# Altium PCB MCP3202.PcbDoc
Units mm, origin at the board's own origin, x right, y up, seen from the top; angles counter-clockwise.
Board outline 22.22 x 25.4 mm, 2 copper layers (Top Layer, Bottom Layer); 3 components, 8 nets, 18 pads, 8 vias.
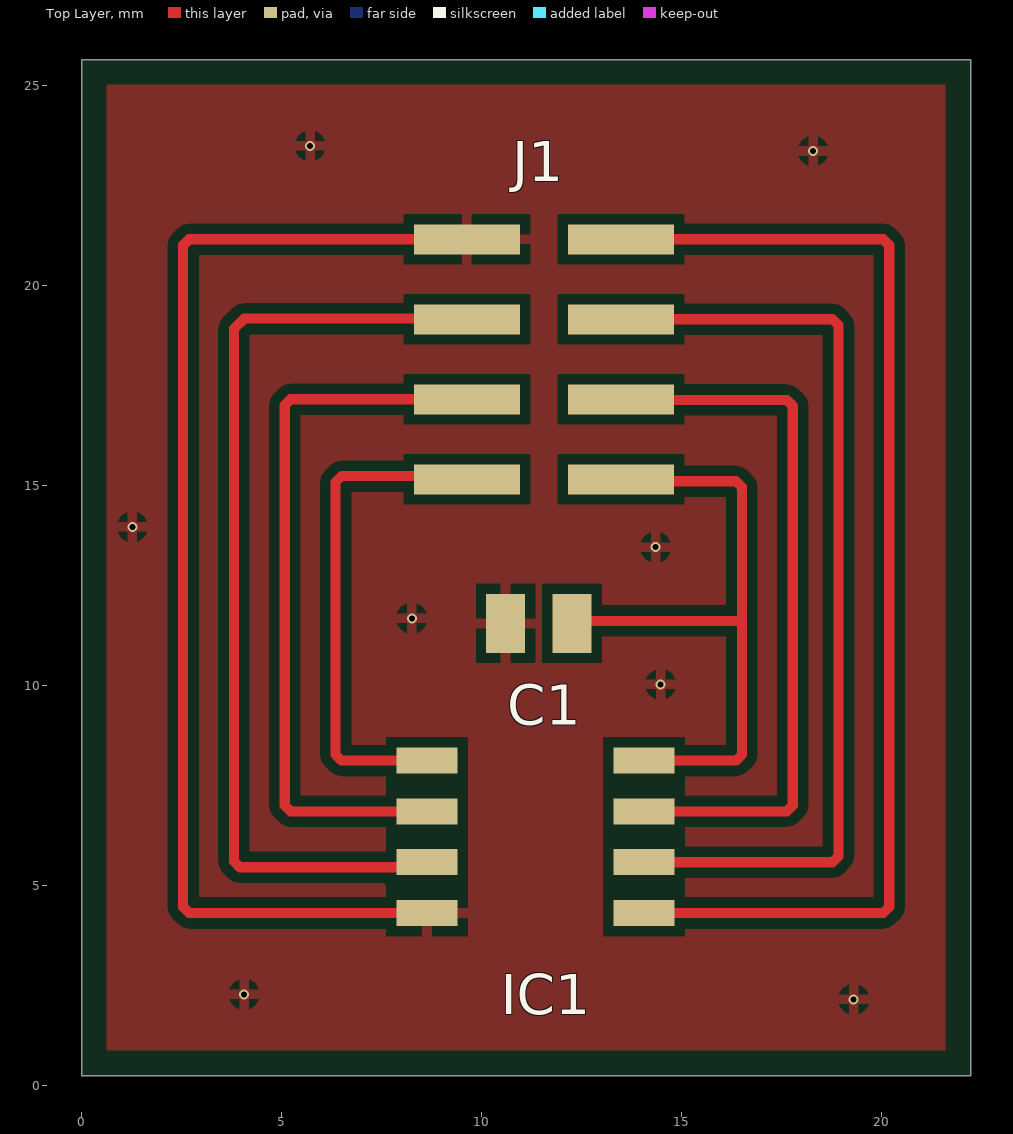
[diagram p0: Top Layer view]
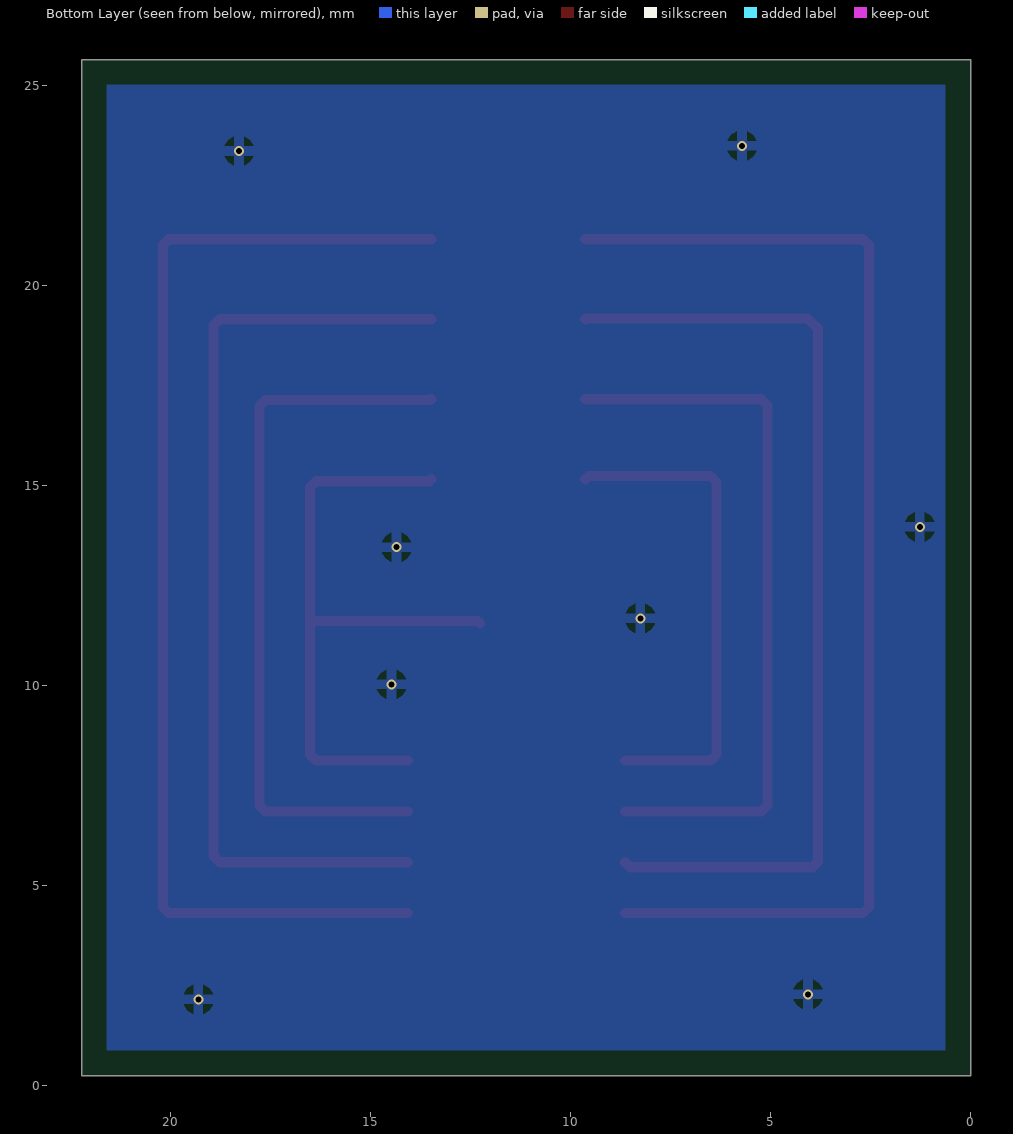
[diagram p1: Bottom Layer view, seen from below]
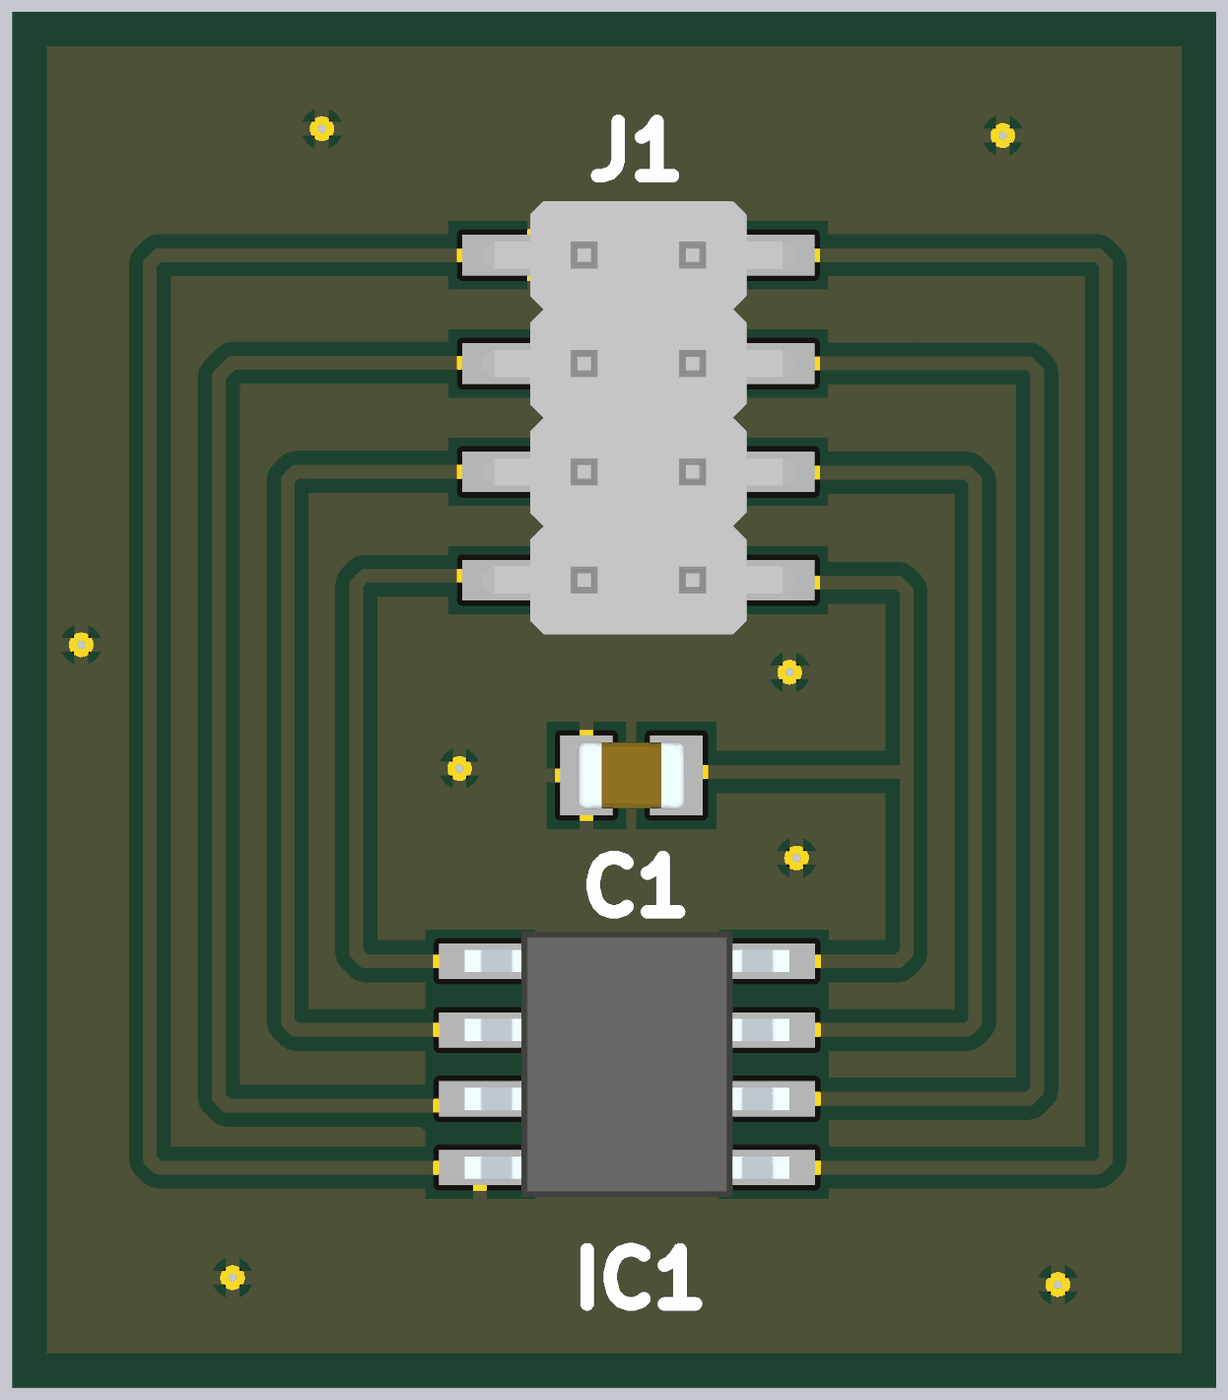
[diagram p2: 3D render of the assembled board from above, using the file's embedded part models]

## Layer stack, top to bottom
Top Solder: solder mask 0.0102, Solder Resist, Dk 3.5
Top Layer: signal copper 0.0356
Dielectric 1: dielectric 0.32, FR-4, Dk 4.8
Bottom Layer: signal copper 0.0356
Bottom Solder: solder mask 0.0102, Solder Resist, Dk 3.5

## Board outline
0,0.254 22.225,0.254 22.225,25.654 0,25.654

## Design rules (kind name [scope] priority, off if disabled: settings)
Clearance [All] p1: gap=0.254 ignorepadtopadclearanceinfootprint=FALSE except(0: Arc-Hole Track-Hole SMDPad-Hole THPad-Hole Via-Hole Fill-Hole Poly-Hole Region-Hole Text-Hole; 0.15: Arc-Arc Arc-Track Arc-SMDPad Track-Track Track-SMDPad SMDPad-SMDPad; 0.5: THPad-THPad)
MinimumSolderMaskSliver [All] p1: minsoldermaskwidth=0.1
PolygonConnect [All] p1: connectstyle=Relief reliefconductorwidth=0.254 reliefentries=4 polygonreliefangle="90 Angle" airgapwidth=0.254
RoutingLayers [All] p1: top layer_v5=TRUE bottom layer_v5=FALSE
RoutingVias [All] p1: holewidth=0.15 width=0.25 viastyle="Through Hole" minholewidth=0.15 minwidth=0.25 maxholewidth=0.2 maxwidth=0.3
SolderMaskExpansion [All] p1: expansion=0.102 istentingtop=FALSE
Width [All] p1: maxlimit=0.9 minlimit=0.15 preferedwidth=0.254 minimp=50.000000 maximp=50.000000 favimp=50.000000
28 further rules are at their usual default settings.

## Components (designator, comment, footprint, x,y, rotation, side; value= is the part's Value field where it differs from the comment)
C1 "GRM21BR71C105MA01K" CAPC2012X145N 11.43,11.557 r0 top (schematic designator ?)
IC1 "MCP3202-BI_SN" SOIC127P600X175-8N 11.348,6.223 r0 top (schematic designator IC?)
J1 "M22-5320405" HUSSP8W50P200_2X4_800X400X500P 11.557,18.161 r90 top (schematic designator J?)

## Footprints (in the part's own frame and the unit in brackets; to place one, negate y for a bottom-side part, rotate by r counter-clockwise, add the part's x,y. Pads: shape width x height; smd on the part's side, far side on the other; paste and mask are expansions set on the pad)
CAPC2012X145N [mm]
  rect 0.97x1.47 smd: 1(-0.83,0) 2(0.83,0)
  body extent -1,-0.63 1,0.63, height 1.45
HUSSP8W50P200_2X4_800X400X500P [mm]
  rect 0.75x2.65 smd: 1(-3,-1.925) 2(-3,1.925) 3(-1,-1.925) 4(-1,1.925) 5(1,-1.925) 6(1,1.925) 7(3,-1.925) 8(3,1.925)
  body extent -4,-2.88 4,2.88, height 6
SOIC127P600X175-8N [mm]
  rect 1.525x0.65 smd: 1(-2.712,1.905) 2(-2.712,0.635) 3(-2.712,-0.635) 4(-2.712,-1.905) 5(2.712,-1.905) 6(2.712,-0.635) 7(2.712,0.635) 8(2.712,1.905)
  body extent -3,-2.45 3,2.45, height 1.75

## Part data
C1: "Capacitor", Manufacturer_Name="Murata Electronics", Mouser Part Number=81-GRM21R71C105MA01K, Datasheet Link=http://www.murata.com/~/media/webrenewal/support/library/catalog/products/capacitor/mlcc/c02e.pdf, Height=1.45mm, Manufacturer_Part_Number=GRM21BR71C105MA01K, Mouser Price/Stock=https://www.mouser.co.uk/ProductDetail/Murata-Electronics/GRM21BR71C105MA01K?qs=%252BOhj5xpo0CKX2ExPHNXi%252Bg%3D%3D
IC1: "Integrated Circuit", Arrow Part Number=MCP3202-BI/SN, Manufacturer_Name=Microchip, Mouser Part Number=579-MCP3202BISN, Arrow Price/Stock=https://www.arrow.com/en/products/mcp3202-bisn/microchip-technology?region=nac, Datasheet Link=https://datasheet.datasheetarchive.com/originals/distributors/Datasheets-19/DSA-360813.pdf, Height=1.75mm, Manufacturer_Part_Number=MCP3202-BI/SN, Mouser Price/Stock=https://www.mouser.co.uk/ProductDetail/Microchip-Technology/MCP3202-BI-SN?qs=C%252BuF95oynlkGMhp5%2FSqbew%3D%3D
J1: "Connector", Manufacturer_Name=Harwin, Mouser Part Number=855-M22-5320405, Datasheet Link=https://cdn.harwin.com/pdfs/M22-532.pdf, Manufacturer_Part_Number=M22-5320405, Mouser Price/Stock=https://www.mouser.co.uk/ProductDetail/Harwin/M22-5320405?qs=WS5Jv%252B%252Bx1qVxYYIoWES7kw%3D%3D

## Via types
v1: diameter 0.25, hole 0.15, Top Layer to Bottom Layer, 8 vias

## Nets (pads, with @x,y where several pads share a name; then routed paths per layer and width w, separated by ;. In a path a pad name is that pad's centre, name@x,y a point inside that pad or via, vN(x,y) a via of type N, cw(c..) or ccw(c..) an arc to the next point about the centre after c; other vN are vias at no path point)
CH0: IC1.2 J1.4 | length 18.2
  Top Layer w0.254: IC1.2 5.229,6.858 5.08,7.007 5.08,17.012 5.229,17.161 J1.4
CH1: IC1.3 J1.6 | length 24.2
  Top Layer w0.254: IC1.3 8.509,5.461 3.959,5.461 3.81,5.61 3.81,18.923 4.064,19.177 9.616,19.177 J1.6
CLK: IC1.7 J1.3 | length 18.1
  Top Layer w0.254: J1.3 13.498,17.145 17.631,17.145 17.78,16.996 17.78,7.007 17.631,6.858 IC1.7
CS: IC1.1 J1.2 | length 12.5
  Top Layer w0.254: IC1.1 6.499,8.128 6.35,8.277 6.35,15.091 6.499,15.24 9.553,15.24 J1.2
DIN: IC1.5 J1.7 | length 29.5
  Top Layer w0.254: J1.7 20.044,21.161 20.193,21.012 20.193,4.467 20.044,4.318 IC1.5
DOUT: IC1.6 J1.5 | length 23.7
  Top Layer w0.254: J1.5 18.774,19.161 18.923,19.012 18.923,5.737 18.774,5.588 IC1.6
VDD: C1.2 IC1.8 J1.1 | length 16.6
  Top Layer w0.254: C1.2 12.324,11.62 16.51,11.62 ; J1.1 13.53,15.113 16.361,15.113 16.51,14.964 16.51,11.62 ; IC1.8 16.361,8.128 16.51,8.277 16.51,11.62
VSS: C1.1 IC1.4 J1.8 | length 29.9
  Top Layer w0.254: IC1.4 2.689,4.318 2.54,4.467 2.54,21.012 2.689,21.161 J1.8
  other v1: 19.304,2.159 4.064,2.286 14.478,10.033 8.255,11.684 14.351,13.462 1.27,13.97 18.288,23.368 5.715,23.495

## Polygon pours and split planes (outlines as drawn)
VSS on Bottom Layer "NONET_L-01_P-001" (solid, pour order 0): 0.635,25.019 21.59,25.019 21.59,0.889 0.635,0.889
VSS on Top Layer "NONET_L-01_P-001" (solid, pour order 2): 0.635,25.019 21.59,25.019 21.59,0.889 0.635,0.889
no net on Bottom Solder "NONET_L-01_P-001" (solid): 0.889,2.413 2.286,2.413 2.286,1.143 0.889,1.143

## Silkscreen, mask and mechanical layers (free items; w line width, h text height)
Mechanical 1:
  lines w0.254: 0.127,0.508 0.254,0.635 0.254,25.4 21.971,25.4 21.971,0.508 0.127,0.508